# Altium PCB LEO_COTS_no_siggen_rev0.PcbDoc
Units mm, origin at the board's own origin, x right, y up, seen from the top; angles counter-clockwise.
Board outline 42.5 x 10 mm, 2 copper layers (Top Layer, Bottom Layer), stack 0.376 mm thick; 2 components, 2 nets, 5 pads, 2 vias.
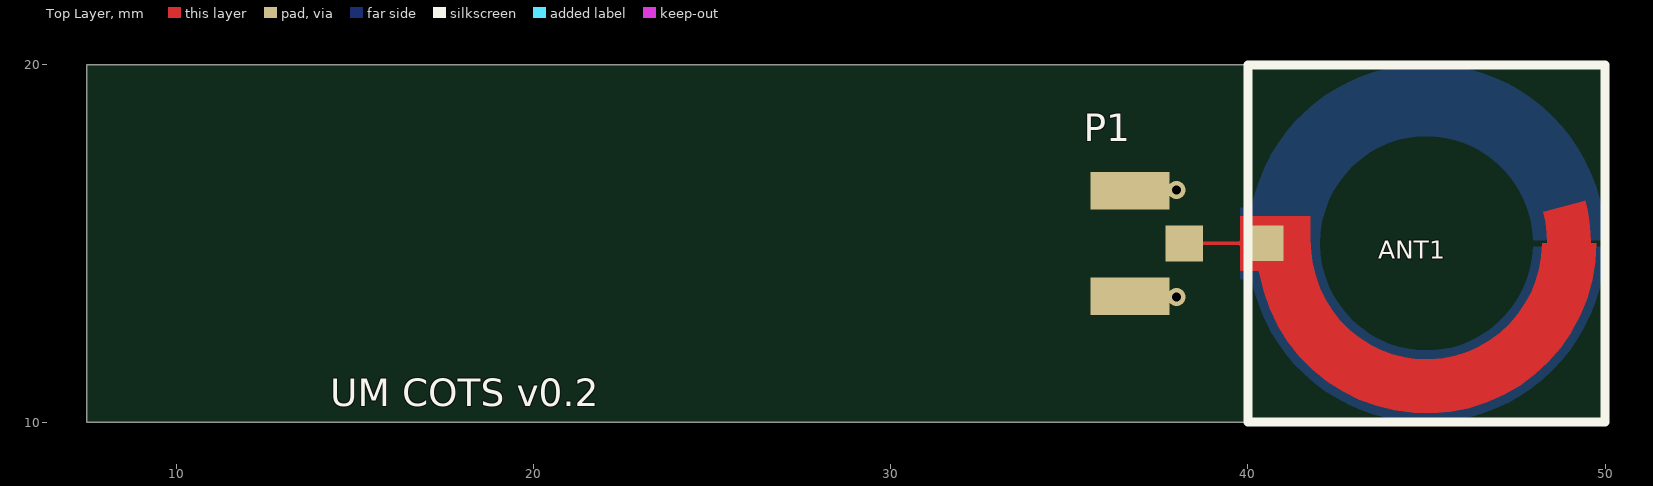
[diagram p0: Top Layer view]
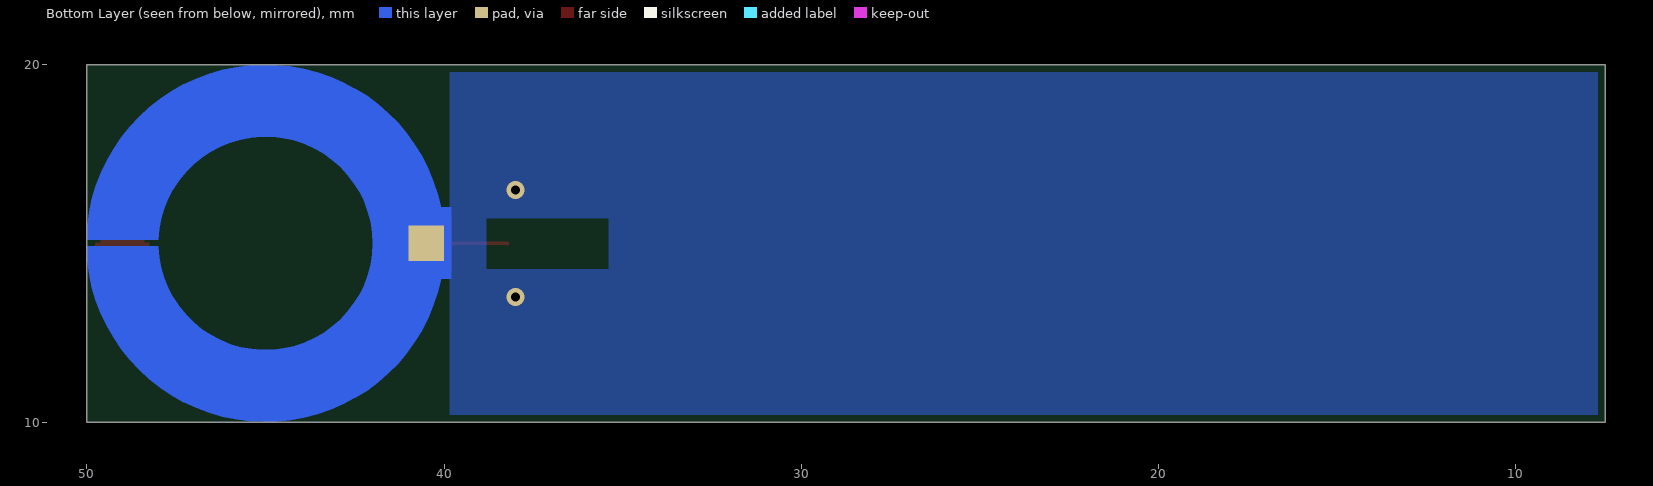
[diagram p1: Bottom Layer view, seen from below]

## Layer stack, top to bottom
Top Solder: solder mask 0.0102, Solder Resist, Dk 3.5
Top Layer: signal copper 0.0356
Dielectric 1: core 0.3048, RO4003C-012, Dk 3.55
Bottom Layer: signal copper 0.0356
Bottom Solder: solder mask 0.0102, Solder Resist, Dk 3.5

## Board outline
7.5,10 50,10 50,20 7.5,20

## Design rules (kind name [scope] priority, off if disabled: settings)
BoardOutlineClearance BoardOutlineClearance_1 [All] p1: gap=0.203 ignorepadtopadclearanceinfootprint=FALSE
Clearance [All] p1: gap=0.102 ignorepadtopadclearanceinfootprint=FALSE
HoleSize [All] p1: absolutevalues=TRUE maxlimit=2.54 minlimit=0.203 maxpercent=80.000 minpercent=20.000
MinimumAnnularRing [All] p1: minimumring=0.203
PlaneConnect [All] p1: planeconnectstyle=Direct reliefexpansion=0.508 reliefentries=4 reliefconductorwidth=0.254 reliefairgap=0.254
PolygonConnect [All] p1: connectstyle=Direct reliefconductorwidth=0.254 reliefentries=4 polygonreliefangle="90 Angle" airgapwidth=0.254
RoutingVias [All] p1: holewidth=0.254 width=0.508 viastyle="Through Hole" minholewidth=0.203 minwidth=0.406 maxholewidth=2.286 maxwidth=2.54
SolderMaskExpansion [All] p1: expansion=0.102 istentingtop=FALSE
Width [All] p1: maxlimit=2.54 minlimit=0.102 preferedwidth=0.102
28 further rules are at their usual default settings.

## Components (designator, comment, footprint, x,y, rotation, side; value= is the part's Value field where it differs from the comment)
ANT1 "ANT" RESLOOP_OD10_fw15_fl180_sw12_sl15 45,15.007 r180 top
P1 "1909763-1" 1909763-1 36.7,15 r90 top

## Footprints (in the part's own frame and the unit in brackets; to place one, negate y for a bottom-side part, rotate by r counter-clockwise, add the part's x,y. Pads: shape width x height; smd on the part's side, far side on the other; paste and mask are expansions set on the pad)
1909763-1 [mm]
  rect 1x1.05 smd: 1(0,-1.525)
  rect 1.05x2.2 smd: 2(-1.475,0) 2(1.475,0)
  body extent -1.5,-1.55 1.5,1.55, height 1.22
RESLOOP_OD10_fw15_fl180_sw12_sl15 [mm] "Microstrip resonant planar loop"
  rect 1x1 smd mask+0.102: 1(4.5,0)
  rect 1x1 smd far side mask+0.102: 2(4.5,0)
  Top Layer region: -4.75,0 -4.6,0 -4.561,-0.6 -4.443,-1.191 -4.443,-1.191 -3.284,-0.88 -3.371,-0.444 -3.4,0 -3.4,0 -3.25,0 -3.23,0.356 -3.172,0.709 -3.075,1.052 -2.941,1.383 -2.772,1.697 -2.569,1.991 -2.335,2.261 -2.073,2.503 -1.786,2.715 -1.477,2.895 -1.151,3.039 -0.81,3.147 -0.46,3.217 -0.105,3.248 0.252,3.24 0.606,3.193 0.953,3.107 1.288,2.984 1.607,2.825 1.907,2.632 2.184,2.406 2.435,2.152 2.656,1.872 2.846,1.57 3.001,1.248 3.12,0.912 3.208,0.52 3.248,0.12 3.25,0.009 3.25,-0.003 3.25,-0.75 5.2,-0.75 5.2,0.75 4.69,0.75 4.559,1.332 4.386,1.824 4.159,2.294 3.882,2.737 3.559,3.146 3.192,3.517 2.787,3.846 2.349,4.129 1.882,4.361 1.392,4.541 0.886,4.667 0.368,4.736 -0.153,4.748 -0.673,4.702 -1.185,4.6 -1.682,4.442 -2.159,4.231 -2.61,3.969 -3.029,3.659 -3.412,3.304 -3.754,2.91 -4.051,2.481 -4.298,2.021 -4.494,1.538 -4.636,1.036 -4.721,0.521
  Top Layer lines w0.013: 5.2,0.75 4.69,0.75 4.559,1.332 4.386,1.824 4.159,2.294 3.882,2.737 3.559,3.146 3.192,3.517 2.787,3.846 2.349,4.129 1.882,4.361 1.392,4.541 0.886,4.667 0.368,4.736 -0.153,4.748 -0.673,4.702 -1.185,4.6 -1.682,4.442 -2.159,4.231 -2.61,3.969 -3.029,3.659 -3.412,3.304 -3.754,2.91 -4.051,2.481 -4.298,2.021 -4.494,1.538 -4.636,1.036 -4.721,0.521 -4.75,0 -4.6,0 ccw(c0,0) -4.443,-1.191 -3.284,-0.88 cw(c0,0) -3.4,0 -3.25,0 -3.23,0.356 -3.172,0.709 -3.075,1.052 -2.941,1.383 -2.772,1.697 -2.569,1.991 -2.335,2.261 -2.073,2.503 -1.786,2.715 -1.477,2.895 -1.151,3.039 -0.81,3.147 -0.46,3.217 -0.105,3.248 0.252,3.24 0.606,3.193 0.953,3.107 1.288,2.984 1.607,2.825 1.907,2.632 2.184,2.406 2.435,2.152 2.656,1.872 2.846,1.57 3.001,1.248 3.12,0.912 3.208,0.52 3.248,0.12 3.25,0.009 3.25,-0.003 3.25,-0.017 3.25,-0.072 3.25,-0.401 3.25,-0.75 5.2,-0.75 5.2,0 5.2,0.75
  Bottom Layer region: -4.999,-0.1 -2.998,-0.1 -2.555,-1.572 -1.442,-2.631 0.05,-3 1.529,-2.581 2.606,-1.486 3,0 2.606,1.486 1.529,2.581 0.05,3 -1.442,2.631 -2.555,1.572 -2.998,0.1 -2.998,0.1 -4.999,0.1 -4.372,2.427 -2.729,4.189 -0.453,4.979 1.929,4.613 3.862,3.175 4.899,1 4.899,1 5.2,1 5.2,-1 4.899,-1 3.862,-3.175 1.929,-4.613 -0.453,-4.979 -2.729,-4.189 -4.372,-2.427 -4.999,-0.1
  Bottom Layer lines w0.013: 5.2,1 4.899,1 ccw(c0,0) -4.999,0.1 -2.998,0.1 cw(c0,0) -2.998,-0.1 -4.999,-0.1 ccw(c0,0) 4.899,-1 5.2,-1 5.2,1

## Part data
ANT1: "PCB antenna"
P1: "CONN UMCC JACK STR 50OHM SMD", Supplier Part Number 1=A118077CT-ND, Manufacturer Part Number=1909763-1, Supplier 1=Digi-Key

## Via types
v1: diameter 0.508, hole 0.254, Top Layer to Bottom Layer, tented both sides, 2 vias

## Nets (pads, with @x,y where several pads share a name; then routed paths per layer and width w, separated by ;. In a path a pad name is that pad's centre, name@x,y a point inside that pad or via, vN(x,y) a via of type N, cw(c..) or ccw(c..) an arc to the next point about the centre after c; other vN are vias at no path point)
GND: ANT1.2 P1.2
  other v1: 38,13.5 38,16.5
NetANT1_1: ANT1.1 P1.1 | length 2.3
  Top Layer w0.102: P1.1 38.232,15.007 39.8,15.007
  Top Layer w0.152: 39.8,15.007 ANT1.1

## Polygon pours and split planes (outlines as drawn)
GND on Bottom Layer "Bottom Layer-GND" (solid, pour order 2): 39.845,10 39.845,19.99 7.5,20.003 7.5,10.01

## Other copper
Bottom Layer:
  pour cut-out: 38.8,14.3 38.8,15.7 35.4,15.7 35.4,14.3

## Silkscreen, mask and mechanical layers (free items; w line width, h text height)
Top Overlay:
  lines w0.254: 40,10 40,20 50,20 50,10 40,10
  text "UM COTS v0.2" at 14.318,10.439 h0.76
Mechanical 5 (Mech5):
  the board outline again, w0.025